# Altium PCB SensorModule_v4.PcbDoc
Units mil, origin at the board's own origin, x right, y up, seen from the top; angles counter-clockwise.
Board outline 3000 x 3000 mil, 2 copper layers (Top Layer, Bottom Layer); 72 components, 95 nets, 293 pads, 52 vias.
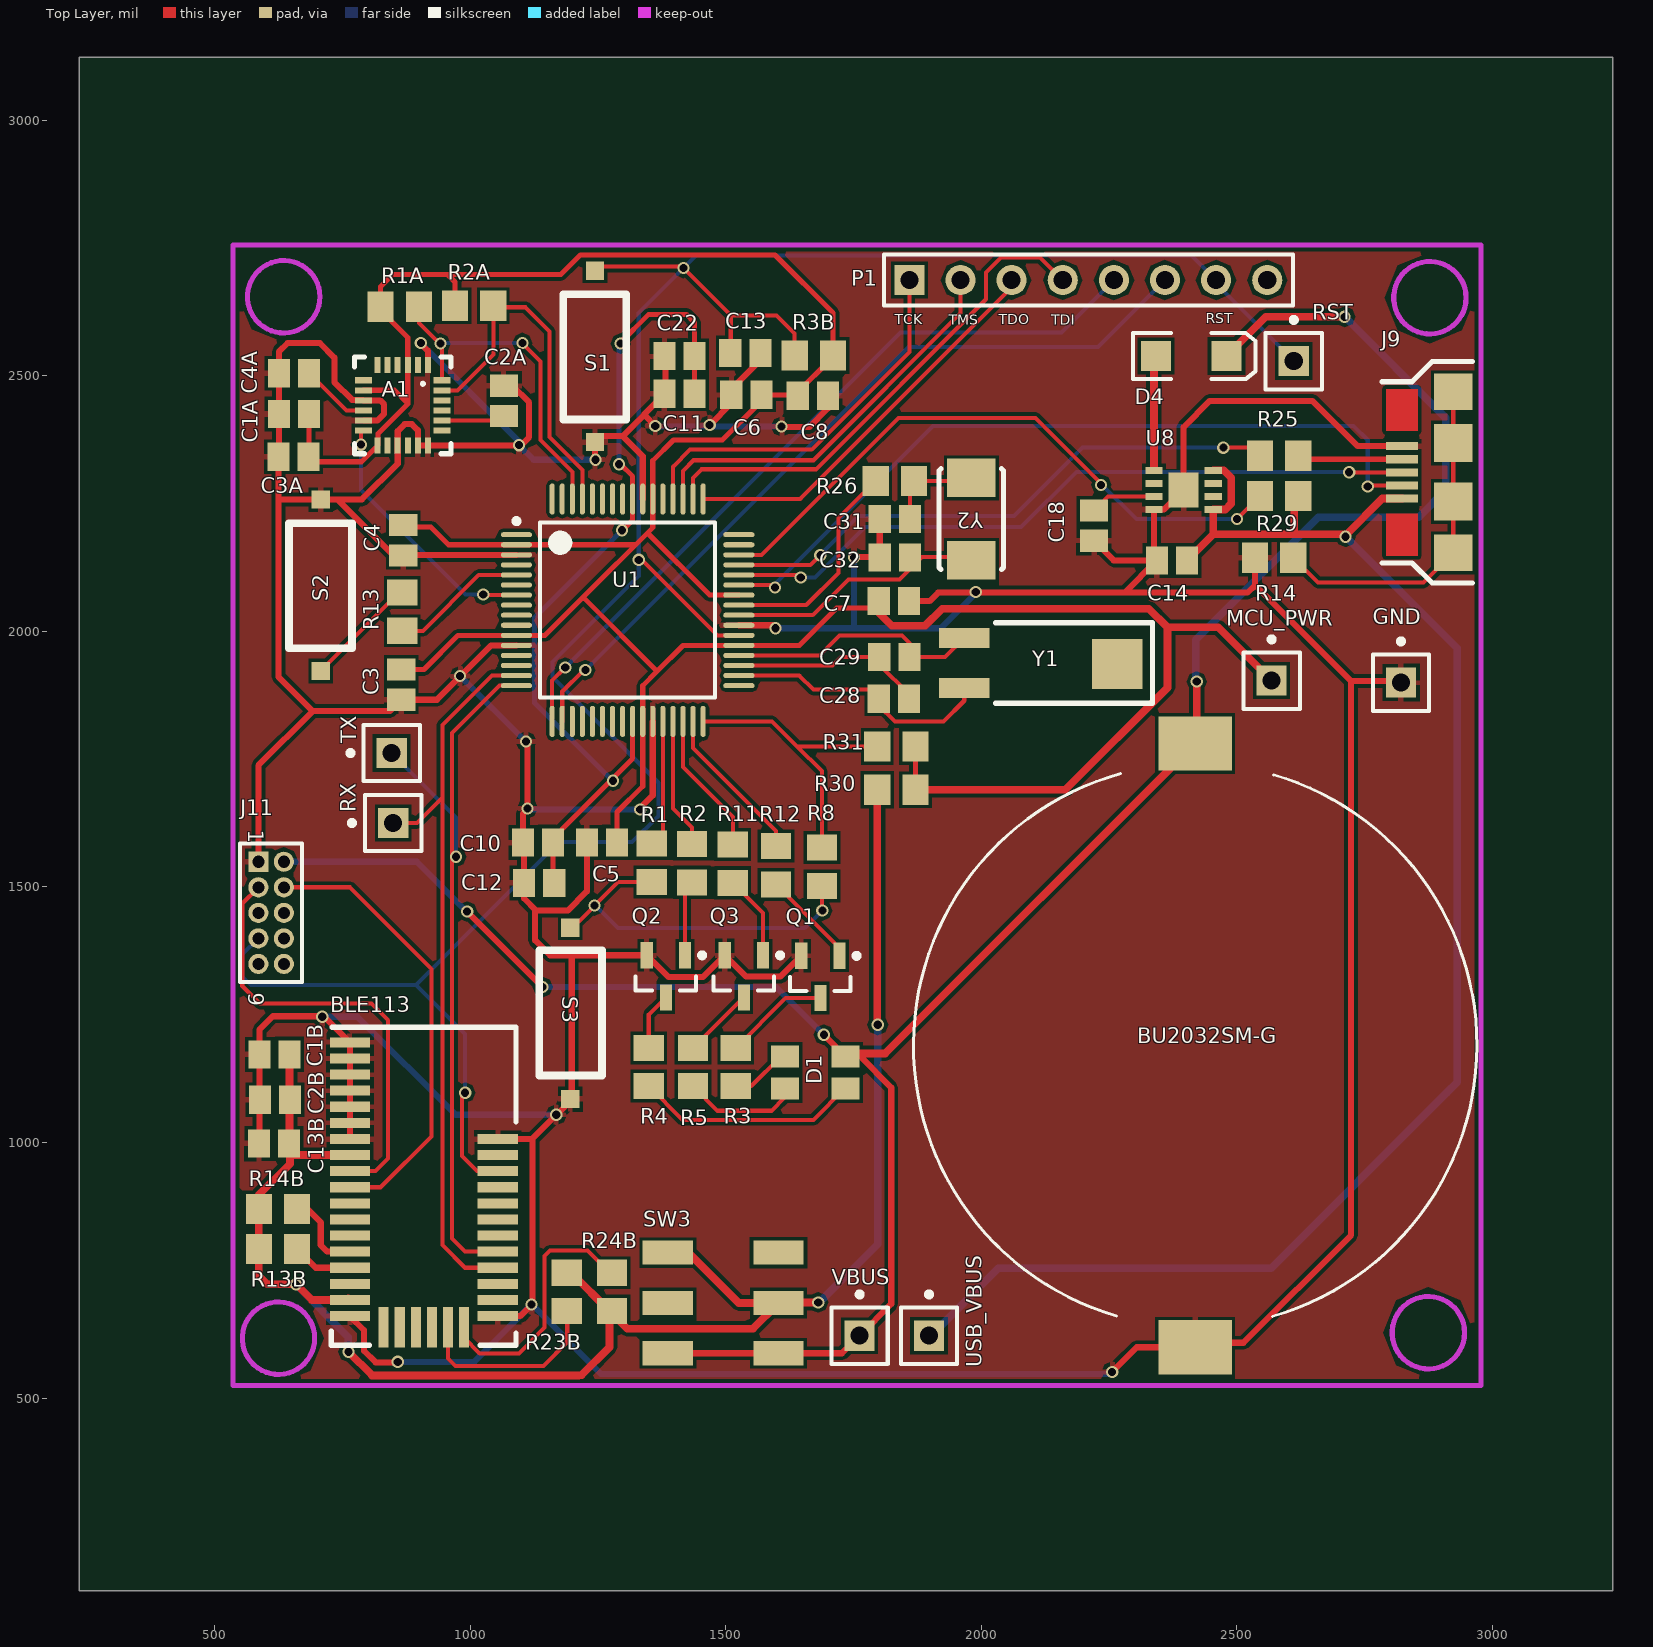
[diagram p0: Top Layer view]
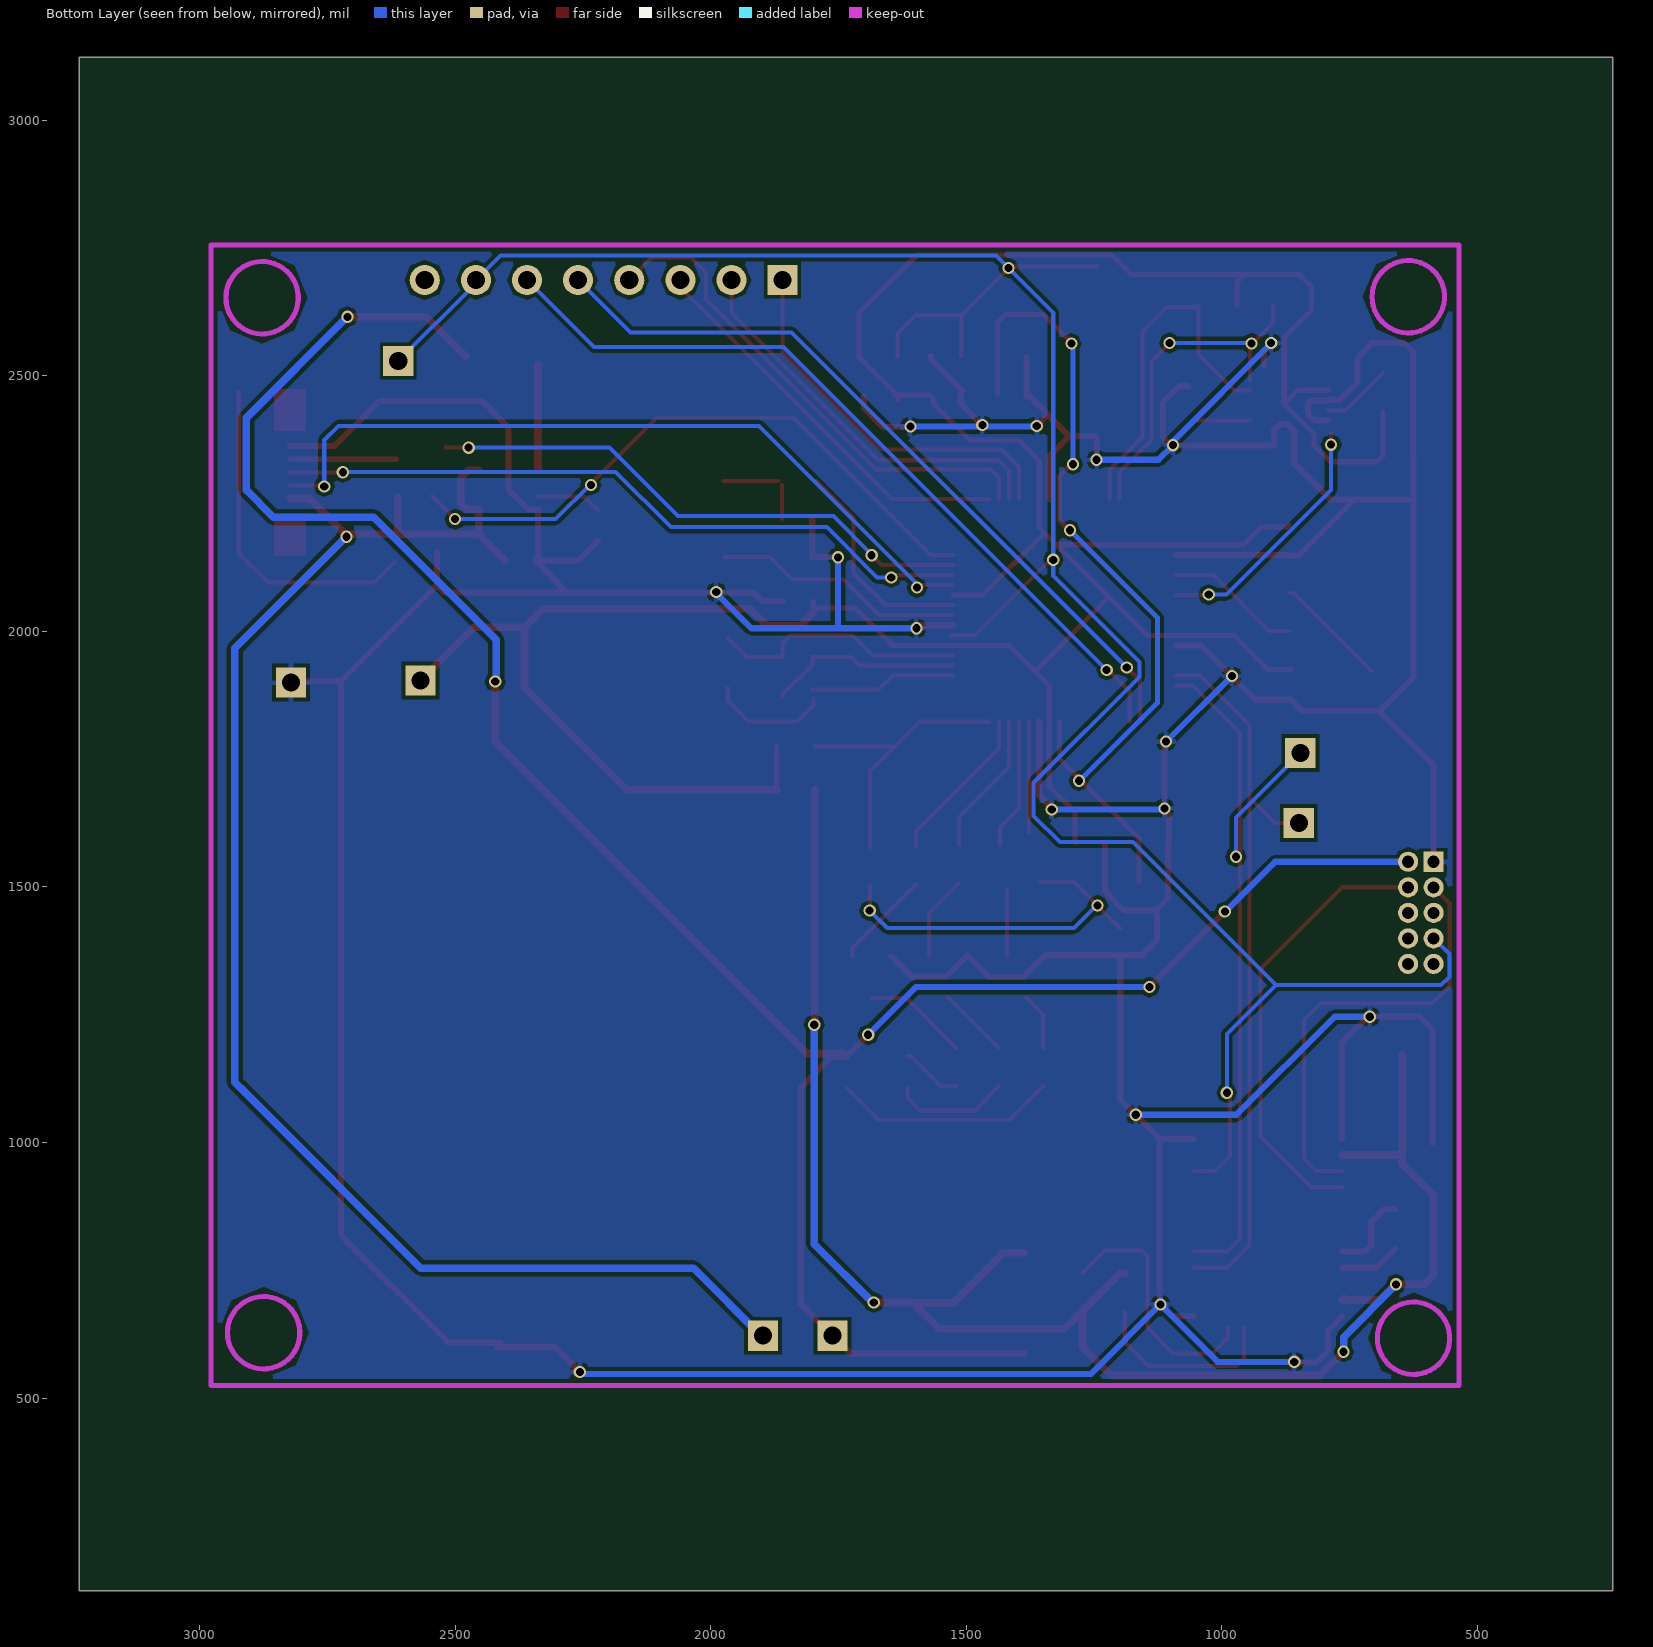
[diagram p1: Bottom Layer view, seen from below]

## Layer stack, top to bottom
Top Layer: signal copper 1.4
Dielectric: core 12.6, FR-4, Dk 4.8
Bottom Layer: signal copper 1.4

## Board outline
235.24,123.03 3235.24,123.03 3235.24,3123.03 235.24,3123.03

## Design rules (kind name [scope] priority, off if disabled: settings)
Clearance [All] p1: gap=7
FabricationTestpoint [(IsPad And (OnTopLayer Or OnBottomLayer))] p1: side=3 testpointundercomponent=TRUE minsize=40 maxsize=100 preferedsize=60 minholesize=0 maxholesize=40 preferedholesize=32 testpointgrid=1 allowsidetop=TRUE allowsidebottom=TRUE usegrid=TRUE gridtolerance=0.01
HoleToHoleClearance [All] p1: gap=7 allowstackedmicrovias=TRUE
MinimumSolderMaskSliver [All] p1: minsoldermaskwidth=1
PolygonConnect [All] p1: connectstyle=Relief reliefconductorwidth=10 reliefentries=4 polygonreliefangle="90 Angle" airgapwidth=10
RoutingVias [All] p1: holewidth=16 width=24 viastyle="Through Hole" minholewidth=12 minwidth=14 maxholewidth=20 maxwidth=50
SilkToSilkClearance [All] p1: silktosilkclearance=6
SilkscreenOverComponentPads [All] p1: minsilkscreentomaskgap=6
SolderMaskExpansion [All] p1: expansion=3
Width [All] p1: maxlimit=15 minlimit=8 preferedwidth=8
23 further rules are at their usual default settings.

## Classes and differential pairs
component class BLE113_module: BLE113 C1B C2B C13B GND J11 R13B R14B R23B R24B RX TX
component class USB: BU2032SM-G C14 C18 D4 J9 R14 R25 R29 SW3 U8 USB_VBUS VBUS
component class TM4C-A: A1 C1A C2A C3A C4A D1 P1 Q1 Q2 Q3 R1 R1A R2 R2A R3 R4 R5 R8 R11 R12 R13 S2 S3 U1
component class TM4C-B: C3 C4 C5 C6 C7 C8 C10 C11 C12 C13 C22 C28 C29 C31 C32 R3B R26 R30 R31 RST S1 Y1 Y2

## Components (designator, comment, footprint, x,y, rotation, side; value= is the part's Value field where it differs from the comment)
A1 "MPU9150" MPU9150 868.11,2441.93 r270 top
BLE113 "BLE113_module" "BLE113 module" 909.45,910.43 r0 top
BU2032SM-G "Batteryholder_BMD_CR2032" Batteryholder_BMD_CR2032 2418.31,1189.96 r90 top
C1A "0.1uF" C0805 655.51,2425.2 r0 top
C1B "0.47uF, 6.3V, X5R" C0805 617.13,1172.24 r0 top
C2A "2.2nF" C0805 1065.94,2450.79 r270 top
C2B "0.47uF, 6.3V, X5R" C0805 618.11,1083.66 r0 top
C3 "0.01uF" C0805 865.16,1895.67 r90 top
C3A "0.01uF" C0805 654.53,2341.54 r0 top
C4 "0.1uF" C0805 869.09,2178.15 r90 top
C4A "0.1uF" C0805 655.51,2504.92 r0 top
C5 "0.01uF" C0805 1257.87,1586.61 r0 top
C6 "0.1uF" C0805 1540.35,2462.6 r0 top
C7 "1.0uF" C0805 1828.74,2059.06 r180 top
C8 "0.01uF" C0805 1670.28,2460.63 r180 top
C10 "0.1uF" C0805 1132.87,1586.61 r0 top
C11 "0.1uF" C0805 1409.45,2464.57 r0 top
C12 "1.0uF" C0805 1134.84,1507.87 r0 top
C13 "0.1uF" C0805 1538.39,2544.29 r180 top
C13B "0.47uF, 6.3V, X5R" C0805 616.14,998.03 r0 top
C14 "1.0uF" C0805 2373.03,2138.78 r0 top
C18 "0.01uF" C0805 2220.47,2206.69 r270 top
C22 "2.2uF" C0805 1409.45,2538.39 r0 top
C28 "24pF" C0805 1828.74,1868.11 r180 top
C29 "24pF" C0805 1829.72,1949.8 r180 top
C31 "10pF" C0805 1830.71,2219.49 r0 top
C32 "10pF" C0805 1830.71,2144.69 r0 top
D1 "S1204RGBSDJC" CLVBA-FKA 1675.2,1136.81 r180 top
D4 "LED2-GREEN" 3.2X1.6X1.1 2410.43,2538.39 r0 top
GND "Socket" PIN1 2820.87,1899.61 r0 top (schematic designator J0)
J9 "ZX62-AB-5PA" ZX62-AB-5PA 2822.83,2311.02 r90 top
J11 "Header 5X2, SMD, 1.27mm" MHDR2X5 585.63,1549.21 r270 top
MCU_PWR "Socket" PIN1 2567.91,1903.54 r0 top (schematic designator J0)
P1 "Header 8" HDR1X8 1859.25,2687.01 r0 top
Q1 "PDTC114ET" SOT23_N 1685.04,1323.82 r270 top
Q2 "PDTC114ET" SOT23_N 1382.87,1324.8 r270 top
Q3 "PDTC114ET" SOT23_N 1535.43,1324.8 r270 top
R1 "0ohm" ERA-0805 1355.32,1547.24 r270 top
R1A "10k" ERA-0805 862.2,2634.84 r0 top
R2 "0ohm" ERA-0805 1434.06,1546.26 r270 top
R2A "10k" ERA-0805 1007.87,2636.81 r0 top
R3 "330ohm" ERA-0805 1519.69,1147.64 r90 top
R3B "10K, 50V, 0.063W" ERA-0805 1672.24,2539.37 r180 top
R4 "330ohm" ERA-0805 1349.41,1147.64 r90 top
R5 "330ohm" ERA-0805 1436.02,1147.64 r90 top
R8 "330ohm" ERA-0805 1687.99,1539.37 r270 top
R11 "0ohm" ERA-0805 1513.78,1545.28 r270 top
R12 "0ohm" ERA-0805 1598.43,1542.32 r270 top
R13 "0ohm" ERA-0805 867.13,2038.39 r90 top
R13B "4.7K, 50V, 0.063W" ERA-0805 624.02,791.34 r180 top
R14 "0ohm" ERA-0805 2572.83,2143.7 r180 top
R14B "4.7K, 50V, 0.063W" ERA-0805 624.02,870.08 r180 top
R23B "100K, 50V, 0.063W" ERA-0805 1188.98,707.68 r90 top
R24B "100K, 50V, 0.063W" ERA-0805 1277.56,707.68 r270 top
R25 "0ohm" ERA-0805 2582.68,2343.5 r0 top
R26 "0ohm" ERA-0805 1830.71,2294.29 r180 top
R29 "0ohm" ERA-0805 2582.68,2264.76 r180 top
R30 "0ohm" ERA-0805 1833.66,1689.96 r0 top
R31 "1M" ERA-0805 1833.66,1774.61 r180 top
RST "Socket" PIN1 2611.22,2528.54 r0 top (schematic designator J6)
RX "Socket" PIN1 849.41,1625 r90 top (schematic designator J5)
S1 "SW-PB" 开关 1305.12,2414.37 r90 top
S2 "SW-PB" 开关 768.7,1966.54 r90 top
S3 "SW-PB" 开关 1134.84,1375.98 r270 top
SW3 "SW DPDT" JS202011SCQN 1495.08,686.02 r270 top
TX "Socket" PIN1 846.46,1761.81 r90 top (schematic designator J4)
U1 "TM4C123GH6PM" LQFP64_L 1308.07,2041.34 r0 top
U8 "TPS73601_DRB_8" DRB8_1P75X1P5 2395.67,2276.57 r0 top
USB_VBUS "Socket" PIN1 1897.64,622.05 r0 top (schematic designator J1)
VBUS "Socket" PIN1 1761.81,622.05 r0 top (schematic designator J2)
Y1 "AB26TRB" AB26TRB 2114.17,1937.99 r180 top
Y2 "ABM3-16.000MHz-T" ABM3 1980.32,2219.49 r270 top

## Footprints (in the part's own frame and the unit in brackets; to place one, negate y for a bottom-side part, rotate by r counter-clockwise, add the part's x,y. Pads: shape width x height; smd on the part's side, far side on the other; paste and mask are expansions set on the pad)
3.2X1.6X1.1 [mm] "SMT LED; 2 Flat Leads"
  rect 1.5x1.5 smd: 1(-1.75,0) 2(1.75,0)
  silkscreen extent -2.9,-1.15 3.2,1.15
AB26TRB [mm]
  rect 2.5x1 smd: 1(3.75,1.25) 2(3.75,-1.25)
  rect 2.5x2.5 smd: ""(-3.85,0.05)
  silkscreen extent -5.6,-2 2.2,2
ABM3 [mm]
  rect 1.9x2.4 smd: 1(-2.05,0) 2(2.05,0)
  silkscreen extent -2.5,-1.6 2.5,1.6
Batteryholder_BMD_CR2032 [mm]
  rect 2.7x3.64 smd: 1(-15,0) 2(15,0)
  silkscreen extent -13.46,-14 13.5,14
"BLE113 module" [mm]
  rect 2x0.5 smd: 1(-3.675,7.25) 2(-3.675,6.45) 3(-3.675,5.65) 4(-3.675,4.85) 5(-3.675,4.05) 6(-3.675,3.25) 7(-3.675,2.45) 8(-3.675,1.65) 9(-3.675,0.85) 10(-3.675,0.05) 11(-3.675,-0.75) 12(-3.675,-1.55) 13(-3.675,-2.35) 14(-3.675,-3.15) 15(-3.675,-3.95) 16(-3.675,-4.75) 17(-3.675,-5.55) 18(-3.675,-6.35) 25(3.675,-6.35) 26(3.675,-5.55) 27(3.675,-4.75) 28(3.675,-3.95) 29(3.675,-3.15) 30(3.675,-2.35) 31(3.675,-1.55) 32(3.675,-0.75) 33(3.675,0.05) 34(3.675,0.85) 35(3.675,1.65) 36(3.675,2.45)
  rect 0.5x2 smd: 19(-2,-6.9) 20(-1.2,-6.9) 21(-0.4,-6.9) 22(0.4,-6.9) 23(1.2,-6.9) 24(2,-6.9)
  silkscreen extent -4.6,-7.8 4.57,8
C0805 [mm] "Chip Capacitor, Body 2.0x1.3mm, IPC High Density"
  rect 1.1x1.4 smd: 1(-0.75,0) 2(0.75,0)
  body extent -1.1,-0.72 1.1,0.72, height 1.4
CLVBA-FKA [mm]
  rect 1.4x1.1 smd: 1(-1.5,0.8) 2(-1.5,-0.8) 3(1.5,0.8) 4(1.5,-0.8)
DRB8_1P75X1P5 [mm]
  rect 0.85x0.35 smd paste-0.412: 1(-1.475,0.975) 2(-1.475,0.325) 3(-1.475,-0.325) 4(-1.475,-0.975) 5(1.475,-0.975) 6(1.475,-0.325) 7(1.475,0.325) 8(1.475,0.975)
  rect 1.5x1.75 smd paste-0.862 mask-0.864: 9(0,0)
ERA-0805 [mm] "Chip Resistor; Body 2 x 1.3 mm (LxW typ)"
  rect 1.3x1.5 smd: 1(-0.95,0) 2(0.95,0)
HDR1X8 [mm] "Connector; Header; 8 Position"
  rect 1.5x1.5 hole 0.9: 1(0,0)
  round 1.5 hole 0.9: 2(2.54,0) 3(5.08,0) 4(7.62,0) 5(10.16,0) 6(12.7,0) 7(15.24,0) 8(17.78,0)
  silkscreen extent -1.27,-1.27 19.05,1.27
JS202011SCQN [mm]
  rect 1.2x2.5 smd: 1(-2.5,-2.75) 2(0,-2.75) 3(2.5,-2.75) 4(-2.5,2.75) 5(0,2.75) 6(2.5,2.75)
LQFP64_L [mm] "Thin QFP, 64-Leads, Body 10x10mm, Pitch 0.5mm, IPC High Density"
  oval 1.55x0.25 smd: 1(-5.525,3.75) 2(-5.525,3.25) 3(-5.525,2.75) 4(-5.525,2.25) 5(-5.525,1.75) 6(-5.525,1.25) 7(-5.525,0.75) 8(-5.525,0.25) 9(-5.525,-0.25) 10(-5.525,-0.75) 11(-5.525,-1.25) 12(-5.525,-1.75) 13(-5.525,-2.25) 14(-5.525,-2.75) 15(-5.525,-3.25) 16(-5.525,-3.75) 33(5.525,-3.75) 34(5.525,-3.25) 35(5.525,-2.75) 36(5.525,-2.25) 37(5.525,-1.75) 38(5.525,-1.25) 39(5.525,-0.75) 40(5.525,-0.25) 41(5.525,0.25) 42(5.525,0.75) 43(5.525,1.25) 44(5.525,1.75) 45(5.525,2.25) 46(5.525,2.75) 47(5.525,3.25) 48(5.525,3.75)
  oval 0.25x1.55 smd: 17(-3.75,-5.525) 18(-3.25,-5.525) 19(-2.75,-5.525) 20(-2.25,-5.525) 21(-1.75,-5.525) 22(-1.25,-5.525) 23(-0.75,-5.525) 24(-0.25,-5.525) 25(0.25,-5.525) 26(0.75,-5.525) 27(1.25,-5.525) 28(1.75,-5.525) 29(2.25,-5.525) 30(2.75,-5.525) 31(3.25,-5.525) 32(3.75,-5.525) 49(3.75,5.525) 50(3.25,5.525) 51(2.75,5.525) 52(2.25,5.525) 53(1.75,5.525) 54(1.25,5.525) 55(0.75,5.525) 56(0.25,5.525) 57(-0.25,5.525) 58(-0.75,5.525) 59(-1.25,5.525) 60(-1.75,5.525) 61(-2.25,5.525) 62(-2.75,5.525) 63(-3.25,5.525) 64(-3.75,5.525)
  silkscreen extent -5.65,-4.35 4.35,4.55, body extent -5,-5 5,5, height 1.6
MHDR2X5 [mm] "Connector; Header; 5x2 Position"
  rect 1x1 hole 0.6: 1(0,0)
  round 1 hole 0.6: 2(0,1.27) 3(1.27,0) 4(1.27,1.27) 5(2.54,0) 6(2.54,1.27) 7(3.81,0) 8(3.81,1.27) 9(5.08,0) 10(5.08,1.27)
  silkscreen extent -0.9,-0.9 5.98,2.17
MPU9150 [mm]
  rect 0.8x0.3 smd: 1(-2,1.25) 2(-2,0.75) 3(-2,0.25) 4(-2,-0.25) 5(-2,-0.75) 6(-2,-1.25) 13(2,-1.25) 14(2,-0.75) 15(2,-0.25) 16(2,0.25) 17(2,0.75) 18(2,1.25)
  rect 0.3x0.85 smd: 7(-1.25,-1.95) 8(-0.75,-1.95) 9(-0.25,-1.95) 10(0.25,-1.95) 11(0.75,-1.95) 12(1.25,-1.95) 19(1.25,1.95) 20(0.75,1.95) 21(0.25,1.95) 22(-0.25,1.95) 23(-0.75,1.95) 24(-1.25,1.95)
  silkscreen extent -2.4,-2.4 2.4,2.4
PIN1 [mm] "Connector; Plug"
  rect 1.5x1.5 hole 0.9: 1(0,0)
  silkscreen extent -1.4,-1.4 1.4,2.17
SOT23_N [mm] "SOT23, 3-Leads, Body 2.9x1.3mm, Pitch 0.95mm, Lead Span 2.3mm, IPC Medium Density"
  rect 1.3x0.6 smd: 1(-1.05,0.95) 2(-1.05,-0.95) 3(1.05,0)
  silkscreen extent -1.17,-1.5 0.7,1.93, body extent -0.7,-1.5 0.7,1.5, height 1.1
ZX62-AB-5PA [mm]
  rect 0.4x1.6 smd: 1(-1.3,0) 2(-0.65,0) 3(0,0) 4(0.65,0) 5(1.3,0)
  rect 1.8x1.9 smd: 6(4,-2.55) 9(-4,-2.55)
  rect 1.9x1.9 smd: 7(1.45,-2.55) 8(-1.45,-2.55)
  Top Layer region: 2.05,-0.8 4.15,-0.8 4.15,0.8 2.05,0.8
  Top Layer region: -4.15,-0.8 -2.05,-0.8 -2.05,0.8 -4.15,0.8
  silkscreen extent -5.5,-3.5 5.5,1
开关 [mm]
  rect 0.9x0.9 smd: 1(-1.118,1.55) 2(7.391,1.55)
  silkscreen extent 0,0 6.23,3.12

## Part data
C1A C1B C2A C2B C3 C3A C4 C4A C5 C6 C7 C8 C10 C11 C12 C13 C13B C14 C18 C22 C28 C29 C31 C32: library part "Cap Semi", "Capacitor (Semiconductor SIM Model)"
D1: "Ultra-Bright RGB Tri-color LED Lamp, 4-Lead 1204-size SMD"
D4: library part LED2, "Typical RED, GREEN, YELLOW, AMBER GaAs LED"
J11: library part MHDR2X5, "Header, 5-Pin, Dual row"
P1: "Header, 8-Pin"
Q1 Q2 Q3: "NPN Resistor-equipped Transistor"
R1 R1A R2 R2A R3 R3B R4 R5 R8 R11 R12 R13 R13B R14 R14B R23B R24B R25 R26 R29 R30 R31: library part ERAS, "Metal Film Thermosensitive Chip Resistor, 0.56 Ohm to 10k Ohm Range, 5% Tolerance, 0805 Size, 0.1 W"
SW3: "Switch"
U8: library part TPS736XXDRB
Y2: library part ABM3

## Via types
v1: diameter 24, hole 16, Top Layer to Bottom Layer, 52 vias

## Nets (pads, with @x,y where several pads share a name; then routed paths per layer and width w, separated by ;. In a path a pad name is that pad's centre, name@x,y a point inside that pad or via, vN(x,y) a via of type N, cw(c..) or ccw(c..) an arc to the next point about the centre after c; other vN are vias at no path point)
3.3V_USB: BLE113.8 BLE113.17 C1B.2 C2B.2 C13B.2 R13B.2 R14B.2 R23B.2 R24B.2 R30.1 SW3.1 SW3.5 | length 3457.1
  Top Layer w15: C13B.2 647.64,996.06 647.64,958.66 586.61,897.64 R13B.2 586.61,739.17 603.35,722.44 v1(659.45,722.44) 689.96,691.93 BLE113.17 BLE113.17@761.81,694.88 ; C13B.2@646.65,999.02 C1B.2 ; C13B.2@648.62,975.39 BLE113.8 ; v1(761.81,590.55) 808.07,544.29 1212.6,544.29 ; R23B.2@1189.96,744.1 1198.82,744.1 R24B.2@1272.64,670.28 ; 1218.5,545.28 1272.64,599.41 R24B.2@1272.64,670.28 ; SW3.1 1427.17,784.45 1525.59,686.02 SW3.5 1553.15,635.83 1307.09,635.83 R24B.2@1272.64,670.28 ; SW3.5@1604.33,687.01 v1(1681.1,687.01) ; v1@1796.26,1232.28 R30.1 R30.1@1796.26,1665.35
  Bottom Layer w15: v1@657.48,723.43 761.81,619.09 v1(761.81,590.55) ; v1@1682.09,686.02 1797.24,801.18 v1(1797.24,1230.32)
GND: A1.1 A1.9 A1.11 A1.15 A1.17 A1.18 BLE113.1 BLE113.2 BLE113.3 BLE113.4 BLE113.5 BLE113.6 BLE113.7 BLE113.18 BLE113.25 BLE113.36 BU2032SM-G.1 C1A.1 C1B.1 C2A.1 C2B.1 C3.1 C3A.1 C4.1 C4A.1 C5.1 C6.1 C7.1 C8.1 C10.1 C11.1 C12.1 C13.1 C13B.1 C14.1 C18.2 C22.1 C31.1 C32.1 GND.1 J9.5 J11.1 Q1.2 Q2.2 Q3.2 R14.2 S1.1 S2.2 S3.2 U1.3 U1.12 U1.27 U1.39 U1.55 U8.4 U8.9 | length 14527.6
  Top Layer w12: J11.1@585.63,1544.29 J11.1 585.63,1737.54 691.93,1843.84 ; C13B.1@587.6,999.02 C1B.1 587.6,1220.47 614.17,1247.05 713.58,1247.05 BLE113.1 BLE113.2 BLE113.3 BLE113.4 BLE113.5 BLE113.6 BLE113.7 ; C3A.1 625,2257.87 ; C3A.1@625.98,2342.52 C1A.1 C4A.1 625.98,2547.24 642.72,2563.98 705.71,2563.98 734.57,2535.12 734.57,2487.2 769.22,2452.55 790.56,2452.55 A1.9 823.82,2451.77 831.69,2443.9 831.69,2425.2 818.9,2412.4 A1.11 ; 741.14,2256.89 849.41,2148.62 C4.1 870.08,2149.61 U1.3 ; BLE113.18 792.32,632.88 792.32,592.52 814.96,569.88 v1@857.28,569.88 ; v1@904.53,2562.01 917.32,2549.21 A1.1 ; BLE113.25 1098.43,660.43 1121.71,683.72 1121.71,1006.89 ; BLE113.36 1121.71,1006.89 ; C2A.1 1082.68,2480.32 1115.16,2447.83 1115.16,2379.92 1098.6,2363.36 v1@1096.28,2363.36 ; U1.12 1041.34,1972.44 935.04,1866.14 C3.1 842.86,1843.84 691.93,1843.84 ; v1@1095.47,2363.36 917.49,2363.36 A1.18 A1.17 897.64,2393.7 885.83,2405.51 872.05,2405.51 858.27,2391.73 A1.15 858.27,2327.76 788.39,2257.87 625,2257.87 ; C10.1 1103.35,1643.7 ; C10.1@1105.32,1584.64 C12.1 1105.32,1477.36 1128.94,1453.74 1190.94,1453.74 1228.35,1491.14 C5.1 ; v1(1112.2,1653.54) v1@1112.2,1781.5 ; 1126.97,1455.71 1126.97,1395.67 1156.5,1366.14 Q2.2 1387.8,1323.82 1455.71,1323.82 Q3.2 1539.37,1324.8 1607.28,1324.8 Q1.2 ; 1198.82,1364.17 1198.82,1084 1121.71,1006.89 ; S1.1@1244.09,2378.24 1244.09,2336.61 v1(1245.08,2335.63) ; S1.1@1247.74,2381.89 1298.23,2381.89 ; v1@1330.71,1652.56 1357.28,1679.13 U1.27 ; U1.55 1337.6,2342.52 1298.23,2381.89 ; 1341.54,2422.24 v1(1362.2,2401.57) ; C11.1 1379.92,2463.58 1298.23,2381.89 ; C11.1@1381.89,2459.65 C22.1@1381.89,2536.42 ; v1(1468.5,2403.54) 1510.83,2445.87 C6.1 ; C6.1@1506.89,2471.46 1508.86,2471.46 1568.9,2531.5 C13.1@1568.9,2538.39 ; U1.39 v1@1596.46,2011.81 ; v1@1611.22,2399.61 1663.39,2399.61 1699.8,2436.02 C8.1 ; v1@1751.97,2145.67 1800.2,2145.67 C32.1 C31.1 ; C7.1 1898.62,2059.06 1915.35,2075.79 2280.51,2075.79 ; C18.2 2258.86,2138.78 C14.1 2280.51,2075.79 ; v1(2255.91,551.18) 2304.13,599.41 BU2032SM-G.1 ; C14.1@2337.6,2144.69 U8.4 2357.28,2238.19 U8.9 2395.67,2399.61 2446.85,2450.79 2647.64,2450.79 2736.22,2362.2 J9.5 ; BU2032SM-G.1@2411.42,608.27 2512.8,608.27 2723.43,818.9 2723.43,1902.56 ; BU2032SM-G.1@2416.34,603.35 BU2032SM-G.1@2422.24,609.25 ; R14.2@2535.43,2153.54 R14.2 2535.43,2090.55 ; GND.1 2817.91,1902.56 2723.43,1902.56 ; 625,2257.87 625,1910.77 691.93,1843.84 ; 2280.51,2075.79 2520.67,2075.79 2535.43,2090.55 ; 2535.43,2090.55 2723.43,1902.56
  Bottom Layer w12: v1(710.63,1246.06) 779.53,1246.06 971.46,1054.13 v1(1168.31,1054.13) ; v1(858.27,570.87) 1007.87,570.87 v1(1120.08,683.07) 1255.91,547.24 v1@2252.95,547.24 ; v1(903.54,2563.98) 1095.47,2372.05 v1(1095.47,2364.17) 1124.02,2335.63 v1(1245.08,2335.63) ; v1(980.32,1912.4) 1108.27,1784.45 1112.09,1784.45 v1(1109.25,1784.45) ; v1@1111.22,1651.57 v1(1332.68,1651.57) ; v1@1363.19,2400.59 v1(1609.25,2400.59) ; v1(1597.44,2005.91) 1920.28,2005.91 v1@1990.16,2075.79 ; 1750.98,2006.89 v1(1750.98,2144.69)
  other v1: 1989.17,2076.77
MCU_PWR: A1.3 A1.8 A1.13 C1A.2 C3.2 C3A.2 C4.2 C5.2 C6.2 C7.2 C8.2 MCU_PWR.1 R1A.1 R2A.1 R3B.1 R30.2 R31.1 U1.2 U1.11 U1.26 U1.37 U1.42 U1.54 | length 6407.7
  Top Layer w10: C3A.2@685.04,2342.52 C1A.2 C1A.2@685.04,2430.12 ; C3A.2@686.03,2341.53 695.87,2331.69 742.13,2331.69 787.4,2331.69 A1.13 820.07,2364.36 820.07,2387 877.95,2444.88 A1.3 877.95,2574.8 824.8,2627.95 R1A.1 824.8,2674.21 848.43,2697.83 955.71,2697.83 ; A1.8 852.36,2471.46 877.95,2445.87 ; C3.2 909.45,1925.2 976.38,1992.13 U1.11 1146.65,1992.13 1219,2064.47 ; C4.2 873.03,2203.74 923.23,2203.74 957.68,2169.29 U1.2 1321.85,2169.29 ; R2A.1 970.47,2683.07 955.71,2697.83 ; 1214.38,2734.97 1177.24,2697.83 955.71,2697.83 ; 1215.63,2736.22 1596.46,2736.22 1709.65,2623.03 R3B.1 ; C5.2 1287.4,1646.65 1337.6,1696.85 U1.26 1337.6,1893.7 1365.73,1921.83 ; 1347.93,2191.44 1468.5,2070.87 U1.42 ; C8.2@1632.87,2452.76 1632.87,2459.46 C8.2@1636.02,2462.6 ; C8.2@1639.76,2462.6 C8.2@1636.02,2462.6 ; R3B.1@1709.65,2540.35 1709.65,2536.66 1636.02,2463.03 C8.2@1636.02,2462.6 ; C7.2@1799.21,2036.42 C7.2 ; C7.2@1799.21,2049.21 1795.28,2045.28 1716.54,2045.28 1643.7,1972.44 U1.37 1416.34,1972.44 1365.73,1921.83 ; R30.2 R31.1 ; 1219,2064.47 1357.28,2202.76 U1.54 1357.28,2333.66 1397.64,2374.02 1493.11,2374.02 1564.96,2445.87 1564.96,2457.68 C6.2 C8.2@1636.02,2462.6 ; 1219,2064.47 1223.09,2064.47 1365.73,1921.83
  Top Layer w15: C7.2@1799.21,2036.42 1824.8,2010.83 1889.76,2010.83 1923.23,2044.29 2327.76,2044.29 2364.17,2007.87 ; R30.2 2164.37,1689.96 2364.17,1889.76 2364.17,2007.87 ; MCU_PWR.1 2463.58,2007.87 2364.17,2007.87
NetA1_10: A1.10 C4A.2 | length 137.5
  Top Layer w8: C4A.2 757.87,2432.09 A1.10@792.32,2432.09
NetA1_20: A1.20 C2A.2 | length 112.2
  Top Layer w8: A1.20 C2A.2@1057.09,2412.4
NetBLE113_9: BLE113.9 J11.3 | length 875
  Top Layer w8: J11.3 554.13,1467.72 554.13,1306.1 588.58,1271.65 807.09,1271.65 839.57,1239.17 839.57,968.5 814.96,943.9 BLE113.9
NetBLE113_10: BLE113.10 J11.4 | length 883.1
  Top Layer w8: J11.4 764.57,1499.21 924.21,1339.57 924.21,1011.81 824.8,912.4 BLE113.10
NetBLE113_11: BLE113.11
NetBLE113_12: BLE113.12
NetBLE113_13: BLE113.13
NetBLE113_14: BLE113.14 R14B.1 | length 163.9
  Top Layer w12: R14B.1 681.1,870.08 707.68,843.5 707.68,799.21 720.47,786.42 BLE113.14
NetBLE113_15: BLE113.15 R13B.1 | length 118.4
  Top Layer w12: R13B.1 697.83,754.92 BLE113.15
NetBLE113_16: BLE113.16
NetBLE113_19: BLE113.19
NetBLE113_20: BLE113.20
NetBLE113_21: BLE113.21
NetBLE113_22: BLE113.22
NetBLE113_23: BLE113.23 R23B.1 | length 379.6
  Top Layer w8: BLE113.23 956.69,577.76 971.46,562.99 1143.7,562.99 1189.96,609.25 R23B.1@1189.96,669.29
NetBLE113_24: BLE113.24 R24B.1 | length 500.7
  Top Layer w8: BLE113.24 988.19,618.11 1018.7,587.6 1095.47,587.6 1145.67,637.8 1145.67,777.56 1156.5,788.39 1229.33,788.39 R24B.1@1272.64,745.08
NetBLE113_26: BLE113.26
NetBLE113_27: BLE113.27
NetBLE113_30: BLE113.30
NetBLE113_31: BLE113.31
NetBLE113_32: BLE113.32
NetBLE113_33: BLE113.33
NetBLE113_34: BLE113.34 C13.2 J11.7 P1.7 R3B.2 RST.1 S1.2 U1.38 | length 4892.4
  Top Layer w8: v1@990.16,1098.43 v1(990.16,1097.44) 984.25,1091.54 984.25,973.43 1013.78,943.9 BLE113.34 ; S1.2@1244.09,2713.24 1414.71,2713.24 v1(1417.32,2710.63) ; v1@1333.66,2142.72 1484.25,1992.13 U1.38@1530.51,1992.13 ; v1@1416.68,2711.28 v1(1417.32,2710.63) ; C13.2@1509.84,2538.39 1509.84,2618.11 ; R3B.2@1634.84,2536.42 R3B.2 1634.84,2582.68 1599.41,2618.11 1509.84,2618.11 ; v1(1417.32,2710.63) 1509.84,2618.11
  Bottom Layer w8: J11.7 554.94,1368.53 554.94,1323.99 570.87,1308.07 894.49,1308.07 ; v1(990.16,1097.44) 990.16,1212.4 894.49,1308.07 ; RST.1 2459.25,2680.51 P1.7 2411.02,2735.24 1441.93,2735.24 v1(1417.32,2710.63) 1329.72,2623.03 v1(1329.72,2139.76) 1329.72,2108.27 1161.42,1939.96 1161.42,1910.43 1368.11,1703.74 1368.11,1638.78 1316.93,1587.6 1174.02,1587.6 894.49,1308.07
NetC10_2: C10.2 C11.2 C12.2 C22.2 U1.25 U1.56 | length 1695.2
  Top Layer w10: C12.2@1162.4,1509.84 C10.2 1162.4,1595.47 1317.91,1750.98 U1.25 ; v1@1293.31,2563.98 1349.41,2620.08 1423.23,2620.08 1438.98,2604.33 C22.2 C11.2 ; v1@1294.29,2326.77 1317.91,2303.15 U1.56 1317.91,2217.52 v1@1298.23,2197.83
  Bottom Layer w10: v1@1276.57,1709.65 1125.98,1860.24 1125.98,2026.57 v1(1297.24,2197.83) ; v1(1291.34,2326.77) v1@1291.34,2560.04
  other v1: 1279.53,1707.68 1294.29,2562.99
NetC18_1: C18.1 U8.3 | length 128.5
  Top Layer w8: C18.1 2248.03,2263.78 U8.3
NetC28_1: C28.1 C29.2 U1.35 | length 383.8
  Top Layer w8: U1.35 1708.66,1933.07 1725.39,1949.8 C29.2 1800.2,1935.4 1859.25,1876.35 C28.1@1859.25,1872.05
NetC28_2: C28.2 U1.34 Y1.1 | length 521.5
  Top Layer w8: U1.34 1643.7,1913.39 1671.26,1885.83 C28.2@1801.18,1885.83 ; C28.2 1799.21,1855.31 1830.71,1823.82 1926.18,1823.82 1966.53,1864.17 Y1.1
NetC29_1: C29.1 U1.36 Y1.2 | length 506.4
  Top Layer w8: U1.36 1683.07,1952.76 1722.44,1992.13 1844.49,1992.13 1859.25,1977.36 C29.1 1929.13,1949.8 Y1.2
NetC31_2: C31.2 R26.1 Y2.1 | length 173.2
  Top Layer w8: C31.2 R26.1@1860.24,2286.42 ; R26.1 Y2.1@1974.41,2294.29
NetC32_2: C32.2 U1.40 Y2.2 | length 495.1
  Top Layer w8: U1.40 1670.28,2031.5 1740.16,2101.38 1839.57,2101.38 1883.86,2145.67 Y2.2@1973.43,2145.67
NetD1_1: D1.1 R4.1 | length 436.9
  Top Layer w8: R4.1 1415.35,1044.29 1671.26,1044.29 D1.1@1733.27,1106.3
NetD1_3: D1.3 R5.1 | length 228.4
  Top Layer w8: R5.1 1484.25,1062.01 1589.57,1062.01 1615.16,1087.6 D1.3@1615.16,1106.3
NetD1_4: D1.4 R3.1 | length 119.9
  Top Layer w8: R3.1 1549.88,1110.24 1608.94,1169.29 D1.4@1615.16,1169.29
NetD4_1: D4.1 U8.1 | length 208.1
  Top Layer w8: U8.1@2336.61,2315.95 U8.1
  Top Layer w15: U8.1 D4.1@2337.6,2521.65
NetJ9_2: J9.2 U1.43 | length 1522.3
  Top Layer w8: U1.43 v1@1596.46,2090.55 ; v1@2757.87,2285.43 J9.2
  Bottom Layer w8: v1(1596.46,2085.63) 1596.46,2092.57 1905.47,2401.57 2728.35,2401.57 2755.91,2374.02 v1@2755.91,2293.31
  other v1: 2755.91,2283.46
NetJ9_3: J9.3 U1.44 | length 1379.9
  Top Layer w8: U1.44 v1@1645.67,2110.24 ; v1(2719.49,2311.02) J9.3
  Bottom Layer w8: v1(1646.65,2105.32) 1674.26,2105.32 1772.68,2203.74 2077.76,2203.74 2186.02,2312.01 v1@2717.52,2312.01
NetJ9_4: J9.4 R25.2 | length 207.7
  Top Layer w10: R25.2@2615.16,2336.61 J9.4
NetJ9_6: J9.6 J9.7 J9.8 J9.9 R14.1 | length 660.8
  Top Layer w8: R14.1@2618.11,2135.83 2658.46,2095.47 2865.16,2095.47 J9.9 J9.8 J9.7 J9.6
NetQ1_1: Q1.1 R12.2 | length 191.1
  Top Layer w8: R12.2 1722.44,1380.9 Q1.1
NetQ1_3: Q1.3 R3.2 | length 205.7
  Top Layer w8: R3.2 1617.13,1282.48 Q1.3
NetQ2_1: Q2.1 R2.2 | length 128.9
  Top Layer w8: Q2.1 R2.2@1420.28,1495.08
NetQ2_3: Q2.3 R4.2 | length 112.3
  Top Layer w8: R4.2 1349.41,1250 Q2.3
NetQ3_1: Q3.1 R11.2 | length 166.2
  Top Layer w8: R11.2 1572.83,1448.82 Q3.1
NetQ3_3: Q3.3 R5.2 | length 140.2
  Top Layer w8: R5.2 1534.45,1283.46 Q3.3
NetR1_2: R1.2 R8.2 S3.1 | length 715.7
  Top Layer w8: S3.1@1198.82,1419 1289.66,1509.84 R1.2 ; v1@1687.99,1459.65 R8.2
  Bottom Layer w8: v1@1243.11,1465.55 1289.37,1419.29 1654.53,1419.29 v1(1688.98,1453.74)
  other v1: 1243.11,1463.58
NetR8_1: R8.1 R31.2 U1.32 | length 578.7
  Top Layer w8: U1.32 1590.55,1823.82 1639.76,1774.61 ; R8.1 1687.99,1726.38 1639.76,1774.61 ; R31.2 1639.76,1774.61
NetR13_2: R13.2 S2.1 | length 222.9
  Top Layer w8: S2.1 860.93,2075.79 R13.2
NetR26_2: R26.2 U1.41 | length 431.3
  Top Layer w8: U1.41 1657.48,2051.18 1720.47,2114.17 1720.47,2221.46 R26.2
NetU1_33: U1.33
PA0/U0RX_VCP_TXD: P1.5 U1.17 | length 1501.7
  Top Layer w8: U1.17 1160.43,1903.54 v1@1185.04,1928.15
  Bottom Layer w8: v1(1186.02,1929.13) 1841.54,2584.65 2156.89,2584.65 P1.5
PA1/U0TX_VCP_RXD: P1.6 U1.18 | length 1566.3
  Top Layer w8: U1.18 1180.12,1881.89 v1@1221.46,1923.23
  Bottom Layer w8: v1(1225.39,1924.21) 1857.28,2556.1 2228.35,2556.1 P1.6
PA2: U1.19
PA3: U1.20
PA4: U1.21
PA5: U1.22
PA6: U1.23
PA7: U1.24
PB0: R25.1 U1.45 | length 1087.2
  Top Layer w8: U1.45 1665.35,2129.92 1679.13,2143.7 v1@1687.01,2143.7 ; v1(2473.43,2359.25) 2517.72,2359.25
  Bottom Layer w8: v1(1685.04,2148.62) 1685.04,2150.59 1759.84,2225.39 2063.98,2225.39 2197.83,2359.25 v1@2472.44,2359.25
PB1: R29.2 U1.46 | length 1232.3
  Top Layer w8: U1.46 1569.88,2149.61 1837.6,2417.32 2106.3,2417.32 v1@2233.27,2290.35 ; v1@2498.03,2217.52 R29.2
  Bottom Layer w8: v1@2234.25,2288.39 2303.15,2219.49 v1(2500,2219.49)
  other v1: 2234.25,2286.42
PB2: U1.47
PB3: U1.48
PB4: U1.58
PB5: U1.57
PB6: U1.1
PB7: U1.4
PC0/TCK/SWCLK: P1.1 U1.52 | length 759.3
  Top Layer w8: U1.52 1396.65,2321.85 1430.12,2355.32 1668.31,2355.32 1859.25,2546.26 P1.1
PC1/TMS/SWDIO: P1.2 U1.51 | length 790.3
  Top Layer w8: U1.51 1416.34,2313.98 1437.01,2334.65 1671.26,2334.65 1959.25,2622.64 P1.2
PC2/TDI: P1.4 U1.50 | length 992
  Top Layer w8: U1.50 1436.02,2300.2 1452.76,2316.93 1676.18,2316.93 2008.86,2649.61 2008.86,2701.77 2038.39,2731.3 2114.96,2731.3 P1.4
PC3/TDO/SWO: P1.3 U1.49 | length 789.4
  Top Layer w8: U1.49 1645.67,2258.86 2059.25,2672.44 P1.3
PC4: BLE113.29 TX.1 U1.16 | length 1508.6
  Top Layer w8: BLE113.29 990.16,786.42 964.57,812.01 964.57,1801.18 1057.09,1893.7 U1.16
  Bottom Layer w8: TX.1 972.44,1635.83 v1(972.44,1559.06)
PC5: BLE113.28 RX.1 U1.15 | length 1446.2
  Top Layer w8: RX.1 895.67,1625 945.87,1675.2 ; BLE113.28 990.16,754.92 945.87,799.21 945.87,1675.2 ; U1.15 1042.32,1913.39 945.87,1816.93 945.87,1675.2
PC6: U1.14
PC7: U1.13
PD0: A1.23 R2A.2 U1.61 | length 710.1
  Top Layer w8: A1.23 975.39,2471.46 1045.28,2541.34 R2A.2 1048.23,2633.86 1108.27,2633.86 1155.51,2586.61 1155.51,2379.92 1219.49,2315.94 U1.61
PD1: A1.24 R1A.2 U1.62 | length 668
  Top Layer w8: R1A.2 899.61,2603.35 944.88,2558.07 A1.24 ; v1@1103.35,2562.01 1137.8,2527.56 1137.8,2374.02 1199.8,2312.01 U1.62
  Bottom Layer w8: v1@939.96,2563.98 v1(1102.36,2563.98)
  other v1: 941.93,2562.99
PD2: U1.63
PD3: U1.64
PD6: U1.53
PD7: U1.10
PE0: U1.9
PE1: U1.8
PE2: A1.12 U1.7 | length 498.2
  Top Layer w8: v1(786.42,2365.16) A1.12@786.42,2387.79 ; v1@1028.54,2070.87 U1.7
  Bottom Layer w8: v1@786.42,2366.14 v1(786.42,2365.16) 786.42,2276.57 991.14,2071.85 v1(1025.59,2071.85)
PE3: U1.6
PE4: U1.59
PE5: U1.60
PF0: R1.1 U1.28 | length 217.5
  Top Layer w8: R1.1@1376.97,1606.3 U1.28
PF1: R2.1 U1.29 | length 255.6
  Top Layer w8: U1.29 1396.65,1653.54 1434.06,1616.14 R2.1
PF2: R11.1 U1.30 | length 281.5
  Top Layer w8: U1.30 1416.34,1734.25 1513.78,1636.81 R11.1
PF3: R12.1 U1.31 | length 311.4
  Top Layer w8: U1.31 1436.02,1771.65 1598.42,1609.25 R12.1
PF4: R13.1 U1.5 | length 268.7
  Top Layer w8: R13.1 907.48,2000.98 1016.73,2110.24 U1.5
USB_VBUS: C14.2 J9.1 R29.1 U8.5 U8.8 USB_VBUS.1 | length 3125.3
  Top Layer w15: C14.2 2453.74,2189.96 ; U8.8 2474.41,2314.96 2489.17,2300.2 2489.17,2250 2477.36,2238.19 U8.5 2453.74,2189.96 ; R29.1@2612.33,2261.68 2612.33,2189.96 ; J9.1 2784.45,2259.84 2714.57,2189.96 2612.33,2189.96 ; 2453.74,2189.96 2612.33,2189.96
  Bottom Layer w15: USB_VBUS.1@1899.61,620.08 2033.46,753.94 2566.93,753.94 2909.94,1096.95 ; v1(2712.6,2185.04) 2931.1,1966.54 2931.1,1118.11 2909.94,1096.95 ; 2915.35,1102.36 2909.94,1096.95
VBUS: BU2032SM-G.2 D1.2 D4.2 J11.2 SW3.3 SW3.6 VBUS.1 | length 4690.9
  Top Layer w12: v1(994.09,1451.77) v1@1139.76,1306.1 ; SW3.3 SW3.6 1727.36,587.6 VBUS.1 1823.82,684.06 1823.82,1107.28 1762.79,1168.31 D1.2 v1(1691.93,1210.63)
  Top Layer w15: D1.2 1740.16,1174.21 1812.01,1174.21 BU2032SM-G.2 ; BU2032SM-G.2@2421.26,1783.47 v1(2421.26,1901.57) ; D4.2 2556.1,2615.16 v1@2707.68,2615.16
  Bottom Layer w12: J11.2 895.67,1549.21 v1@991.14,1453.74 ; v1(1141.73,1304.13) 1598.43,1304.13 v1@1694.88,1207.68
  Bottom Layer w15: v1@2419.29,1908.46 2419.29,1983.27 2659.45,2223.43 2855.31,2223.43 2908.46,2276.57 2908.46,2417.32 v1(2710.63,2615.16)
pads on no net: A1.2 A1.4 A1.5 A1.6 A1.7 A1.14 A1.16 A1.19 A1.21 A1.22 BLE113.35 J11.5 J11.6 J11.8 J11.9 J11.10 P1.8 SW3.2 SW3.4 U8.2 U8.6 U8.7 Y1.

## Polygon pours and split planes (outlines as drawn)
GND on Top Layer "Keep-Out Layer-No Net" (solid, remove dead copper, pour order 2): 538.39,2752.95 532.48,2747.05 532.48,534.45 2957.68,534.45 2976.38,515.75 2969.49,522.64 2969.49,2752.95 544.29,2752.95 538.39,2747.05 532.48,2752.95
GND on Bottom Layer "Keep-Out Layer-No Net" (solid, remove dead copper, pour order 4): 538.39,2752.95 538.39,533.46 532.48,527.56 2982.28,527.56 2982.28,2758.86 532.48,2758.86

## Keep-outs
Keep-Out Layer:
  circle w10: c625,617.13 r70.87
  circle w10: c635.3,2654.5 r70.87
  circle w10: c2877.43,2652.54 r70.87
  circle w10: c2874.47,627.93 r70.87
  lines w10: 536.42,524.61 2977.36,524.61 2977.36,2755.91 536.42,2755.91 536.42,524.61

## Silkscreen, mask and mechanical layers (free items; w line width, h text height)
Top Overlay:
  text "RST" at 2438.98,2602.36 h20
  text "TCK" at 1830.71,2600.39 h20
  text "TDO" at 2034.45,2600.39 h20
  text "TMS" at 1936.02,2599.41 h20
  text "TDI" at 2136.81,2599.41 h20

## Text inside footprints (layer, text, board x,y; h text height)
J11: Top Overlay "9" at 565.63,1293.31 h30 r270; Top Overlay "1" at 565.63,1612.2 h30 r270